# EAGLE board INTEVLogger2 (EAGLE 7.6.0)
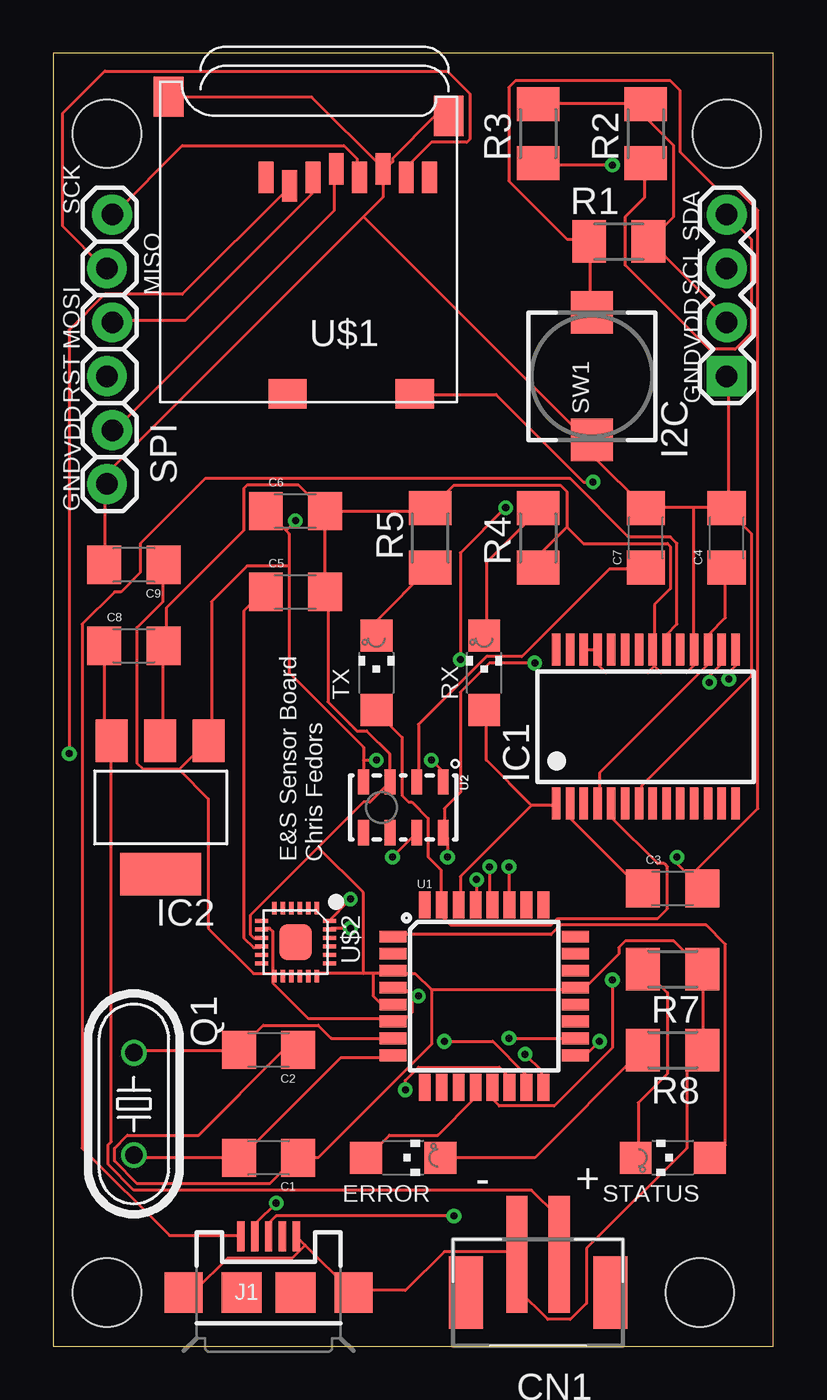
[diagram p0: board, top side]
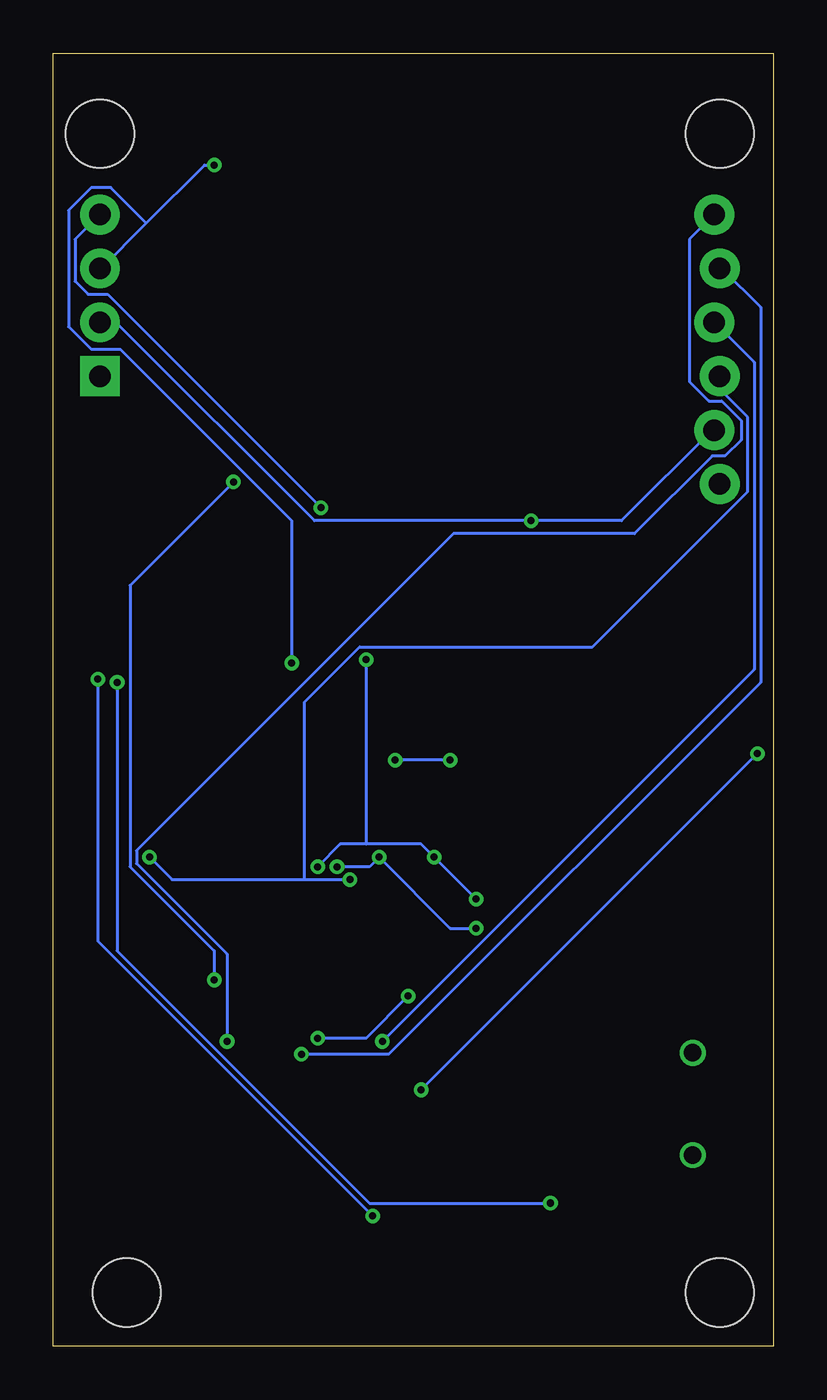
[diagram p1: board, bottom side, seen from below]

Size 33.96 x 60.95 mm. Coordinates in mm from the lower left corner, seen from the top.
Outline: 0,0 33.96,0 33.96,60.95 0,60.95 0,0
Copper layers (1*16): Top 0.0356mm / dielectric 1.5011mm / Bottom 0.0356mm
Design rules "LaenPCBOrder": minimum track width 6mil, minimum drill 13mil, track to track 6mil, track to pad 6mil, pad to pad 6mil, via to via 6mil, smd to smd 6mil, copper to edge 15mil, drill to drill 6mil, minimum pad ring 7mil, minimum via ring 7mil, stop-mask expansion 3mil, vias tented up to drill 0mil, thermal gap 10mil
Holes 3.2 mm at 31.75,57.15 2.54,57.15 2.54,2.54 30.48,2.54

## Footprints (pad centres in the part's own frame; a part is rotated, then mirrored left to right if it is on the bottom)
1206 = smd 1.6 x 1.8: 1 -1.4,0; 2 1.4,0
JST-PH-2-SMT = smd 1 x 5.5: 1 -1,-1.8; 2 1,-1.8 | smd 1.6 x 3.4: NC1 -3.4,0; NC2 3.4,0
1X04 = drill 1.016 pad 1.88 square: 1 0,0 | drill 1.016 pad 1.88: 2 2.54,0; 3 5.08,0; 4 7.62,0
SSOP28 = smd 0.4 x 1.5: 1 -4.225,-3.625; 2 -3.575,-3.625; 3 -2.925,-3.625; 4 -2.275,-3.625; 5 -1.625,-3.625; 6 -0.975,-3.625; 7 -0.325,-3.625; 8 0.325,-3.625; 9 0.975,-3.625; 10 1.625,-3.625; 11 2.275,-3.625; 12 2.925,-3.625; 13 3.575,-3.625; 14 4.225,-3.625; 15 4.225,3.625; 16 3.575,3.625; 17 2.925,3.625; 18 2.275,3.625; 19 1.625,3.625; 20 0.975,3.625; 21 0.325,3.625; 22 -0.325,3.625; 23 -0.975,3.625; 24 -1.625,3.625; 25 -2.275,3.625; 26 -2.925,3.625; 27 -3.575,3.625; 28 -4.225,3.625
SOT223 = smd 1.499 x 2.007: 1 -2.261,-3.15; 2 0.025,-3.15; 3 2.311,-3.15 | smd 3.81 x 2.007: 4 0,3.15
USB-MICROB = smd 0.35 x 1.4: D+ 0,2.65; D- -0.65,2.65; GND 1.3,2.65; ID 0.65,2.65; VBUS -1.3,2.65 | smd 1.8 x 1.9: MT1 -4,0; MT2 4,0 | smd 1.9 x 1.9: P$1 -1.27,0; P$2 1.27,0
CHIPLED_1206 = smd 1.5 x 1.5: A 0,-1.75; C 0,1.75
HC49/S = drill 0.813: 1 -2.413,0; 2 2.413,0
M1206 = smd 1.6 x 2: 1 -1.4,0; 2 1.4,0
1X06_LOCK = drill 1.016 pad 1.88: 1 0,0; 2 2.54,-0.254; 3 5.08,0; 4 7.62,-0.254; 5 10.16,0; 6 12.7,-0.254
PUSHBUTTON_SMD_SJ = smd 2 x 2: P$1 3,0; P$2 -3,0
TQFP32-08 = smd 1.27 x 0.559: 1 -4.293,2.8; 2 -4.293,2; 3 -4.293,1.2; 4 -4.293,0.4; 5 -4.293,-0.4; 6 -4.293,-1.2; 7 -4.293,-2; 8 -4.293,-2.8; 17 4.293,-2.8; 18 4.293,-2; 19 4.293,-1.2; 20 4.293,-0.4; 21 4.293,0.4; 22 4.293,1.2; 23 4.293,2; 24 4.293,2.8 | smd 0.559 x 1.27: 9 -2.8,-4.293; 10 -2,-4.293; 11 -1.2,-4.293; 12 -0.4,-4.293; 13 0.4,-4.293; 14 1.2,-4.293; 15 2,-4.293; 16 2.8,-4.293; 25 2.8,4.293; 26 2,4.293; 27 1.2,4.293; 28 0.4,4.293; 29 -0.4,4.293; 30 -1.2,4.293; 31 -2,4.293; 32 -2.8,4.293
LGA8 = smd 1.2 x 0.5: 1 -1.2,1.875; 2 -1.2,0.625; 3 -1.2,-0.625; 4 -1.2,-1.875; 5 1.2,-1.875; 6 1.2,-0.625; 7 1.2,0.625; 8 1.2,1.875
MICROSD = smd 0.7 x 1.5: 1 9,-10.64; 2 7.9,-10.24; 3 6.8,-10.64; 4 5.7,-11.04; 5 4.6,-10.64; 6 3.5,-11.04; 7 2.4,-10.64; 8 1.3,-10.64 | smd 1.8 x 1.4: CD1 2,-0.44; CD2 8,-0.44 | smd 1.4 x 1.9: MT1 0.4,-13.54; MT2 13.6,-14.44
LEAD-QFN24 = smd 0.6 x 0.2: 1 -1.6,1; 2 -1.6,0.6; 3 -1.6,0.2; 4 -1.6,-0.2; 5 -1.6,-0.6; 6 -1.6,-1; 13 1.6,-1; 14 1.6,-0.6; 15 1.6,-0.2; 16 1.6,0.2; 17 1.6,0.6; 18 1.6,1 | smd 0.2 x 0.6: 7 -1,-1.6; 8 -0.6,-1.6; 9 -0.2,-1.6; 10 0.2,-1.6; 11 0.6,-1.6; 12 1,-1.6; 19 1,1.6; 20 0.6,1.6; 21 0.2,1.6; 22 -0.2,1.6; 23 -0.6,1.6; 24 -1,1.6 | smd 1.7 x 1.54: 25 0,0

## Placement (x,y rotation side)
C1  22 pF  [1206]  10.16,8.89 180 top
C2  22 pF  [1206]  10.16,13.97 180 top
C3  0.1 uF  [1206]  29.21,21.59 0 top
C4  0.1 uF  [1206]  31.75,38.1 90 top
C5  0.1 uF  [1206]  11.43,35.56 0 top
C6  0.1 uF  [1206]  11.43,39.37 0 top
C7  0.1 uF  [1206]  27.94,38.1 90 top
C8  0.1 uF  [1206]  3.81,33.02 0 top
C9  10 uF  [1206]  3.81,36.83 180 top
CN1  [JST-PH-2-SMT]  22.86,2.54 180 top
I2C  [1X04]  31.75,45.72 90 top
IC1  FT232RL  [SSOP28]  27.94,29.21 0 top
IC2  REG1118  [SOT223]  5.08,25.4 180 top
J1  USB-MICROB  [USB-MICROB]  10.16,2.54 0 top
LED1  YELLOW  [CHIPLED_1206]  20.32,31.75 0 top
LED2  YELLOW  [CHIPLED_1206]  15.24,31.75 0 top
LED4  GREEN  [CHIPLED_1206]  29.21,8.89 90 top
LED5  RED  [CHIPLED_1206]  16.51,8.89 270 top
Q1  8 MHz  [HC49/S]  3.81,11.43 270 top
R1  10k  [M1206]  26.67,52.07 180 top
R2  10k  [M1206]  27.94,57.15 90 top
R3  10k  [M1206]  22.86,57.15 90 top
R4  100  [M1206]  22.86,38.1 90 top
R5  100  [M1206]  17.78,38.1 270 top
R7  100  [M1206]  29.21,17.78 180 top
R8  100  [M1206]  29.21,13.97 180 top
SPI  [1X06_LOCK]  2.54,40.64 90 top
SW1  [PUSHBUTTON_SMD_SJ]  25.4,45.72 90 top
U1  ATMEGA328P_TQFP  [TQFP32-08]  20.32,16.51 0 top
U2  MPL3115A2LGA8  [LGA8]  16.51,25.4 270 top
U$1  MICROSD  [MICROSD]  19.05,44.45 180 top
U$2  MPU-9250  [LEAD-QFN24]  11.43,19.05 270 top

## Library data of the parts
C1-C9 = SparkFun-Capacitors
CN1 LED1 LED2 LED4 LED5 R1-R5 R7 R8 SW1 U$1 = adafruit
I2C = SparkFun-Connectors; PROD_ID: CONN-09696
IC1 = ftdichip; MPN: FT232RL; OC_FARNELL: 1146032; OC_NEWARK: 91K9918
IC2 = burr-brown; MPN: REG1118-2.85/2K5G4; OC_FARNELL: unknown; OC_NEWARK: 14M2185
J1 = SparkFun-Connectors; PROD_ID: CONN-09505
Q1 = adafruit; OC_FARNELL: 1667008; OC_NEWARK: unknown
SPI = SparkFun-Connectors
U1 = SparkFun-DigitalIC; PROD_ID: IC-09069
U2 = SparkFun-Sensors; PROD_ID: IC-10869
U$2 = invensense

## Nets
CD: U1.13 U$1.CD1
CS: U1.14 U$1.2
DM: IC1.16 J1.D-
DP: IC1.15 J1.D+
DTR: C3.1 IC1.2
GND: C1.1 C2.1 C4.2 C5.2 C6.2 C7.2 C8.2 C9.2 CN1.2 I2C.1 IC1.7 IC1.18 IC1.21 IC1.25 IC1.26 IC2.2 J1.GND J1.MT1 J1.MT2 R4.1 R5.1 R7.1 R8.1 SPI.1 SW1.P$2 U1.3 U1.5 U1.21 U2.3 U$1.6 U$1.MT1 U$1.MT2 U$2.9 U$2.18
MISO: SPI.5 U1.16 U$1.7
MOSI: SPI.4 U1.15 U$1.3
N$1: C1.2 Q1.2 U1.8
N$2: C2.2 Q1.1 U1.7
N$3: C5.1 U$2.10
N$4: LED4.A U1.1
N$5: C8.1 CN1.1 IC2.3
N$6: C4.1 IC1.4 IC1.17
N$7: U1.23
N$8: C7.1 U2.2
N$9: U1.24
N$10: LED4.C R7.2
N$12: LED1.C R4.2
N$13: LED2.C R5.2
N$15: LED5.C R8.2
RESET: C3.2 R1.2 SPI.3 SW1.P$1 U1.29
RLED: LED5.A U1.12
RX: IC1.1 LED1.A U1.30
SCK: SPI.6 U1.17 U$1.5
SCL: I2C.3 R3.1 U1.28 U2.8 U$2.23
SDA: I2C.4 R2.1 U1.27 U2.7 U$2.24
TX: IC1.5 LED2.A U1.31
USBVDD: IC1.20 J1.VBUS
VDD: C6.1 C9.1 I2C.2 IC2.1 R1.1 R2.2 R3.2 SPI.2 U1.4 U1.6 U1.18 U2.1 U2.4 U$1.4 U$2.8 U$2.13

## Tracks (layer width: path | path; a pad name or v marks a point on that pad's centre or on a via)
CD  (via drill 0.33)
  Top 0.152: v26.36,17.27 26.36,14.07 23.62,11.33 21.03,11.33 20.73,11.63 20.73,12.09 U1.13 | v25.45,40.74 24.99,40.74 20.88,44.86 17.07,44.86 U$1.CD1
  Bottom 0.152: v26.36,17.27 26.36,18.64 30.33,22.61 30.33,35.87 v25.45,40.74
CS  (via drill 0.33)
  Top 0.152: v16.61,12.09 16.61,12.55 17.22,13.16 21.03,13.16 21.49,12.7 21.49,12.24 U1.14 | v0.76,27.94 0.76,47.9 2.44,49.58 6.1,49.58 11.12,54.61 U$1.2
  Bottom 0.152: v0.76,27.94 v16.61,12.09
DM  (via drill 0.33)
  Top 0.152: v10.52,6.76 9.6,5.84 9.6,5.23 J1.D- | v30.94,31.29 30.94,31.6 31.39,32.05 31.39,32.82 IC1.16
  Bottom 0.152: v10.52,6.76 19.05,6.76 30.94,18.64 v30.94,31.29
DP  (via drill 0.33)
  Top 0.152: v18.9,6.15 10.52,6.15 10.21,5.84 10.21,5.23 J1.D+ | v31.85,31.45 31.85,31.75 32.16,32.05 32.16,32.82 IC1.15
  Bottom 0.152: v18.9,6.15 31.85,19.1 v31.85,31.45
DTR
  Top 0.152: IC1.2 24.38,25.5 24.38,24.89 27.74,21.54 C3.1
GND
  Top 0.152: 11.89,4.77 14.02,2.64 J1.MT2 14.17,2.64 16.61,2.64 18.44,4.47 21.79,4.47 CN1.2 21.95,4.32 21.95,2.64 23.32,1.27 24.38,1.27 25.15,2.03 25.15,4.62 29.87,9.35 29.87,13.31 30.48,13.92 R8.1 30.63,14.07 30.63,17.73 R7.1 30.48,17.88 29.26,19.1 26.98,19.1 26.67,18.8 26.67,18.49 25.15,16.97 24.69,16.97 U1.21 24.54,16.81 17.83,16.81 | 11.89,4.77 11.58,5.08 J1.GND | 11.89,4.77 11.28,4.17 8.23,4.17 6.71,2.64 6.25,2.64 J1.MT1 | 12.5,23.52 14.63,25.65 14.94,25.65 15.85,26.57 U2.3 15.85,26.72 15.85,27.94 14.78,29.01 14.33,29.01 12.95,30.38 12.95,35.56 C5.2 12.8,35.56 12.8,39.37 | 12.5,23.52 9.3,20.32 9.3,19.41 9.45,19.25 9.75,19.25 U$2.9 | 15.09,17.58 16,17.58 U1.3 16.15,17.58 17.07,17.58 17.83,16.81 | 15.09,17.58 14.63,17.58 | 14.63,17.58 12.5,17.58 U$2.18 | 15.09,17.58 15.09,16.51 15.39,16.2 16,16.2 U1.5 | 17.83,16.81 17.83,14.22 12.5,8.89 C1.1 11.43,8.89 10.21,7.67 3.96,7.67 2.9,8.74 2.9,9.35 3.5,9.96 6.86,9.96 10.82,13.92 11.43,13.92 C2.1 | 12.5,23.52 14.63,21.39 14.63,17.58 | C9.2 2.44,36.93 2.44,40.59 SPI.1 2.59,40.74 2.59,41.2 14.63,53.24 | U$1.6 15.7,55.52 16,55.83 16,55.98 17.98,57.96 18.59,57.96 U$1.MT1 | U$1.MT2 5.49,58.88 12.19,58.88 15.54,55.52 U$1.6 | 14.63,53.24 15.54,54.15 15.54,55.37 U$1.6 | IC1.26 25.15,32.82 25.6,32.82 IC1.25 25.76,32.82 25.76,32.05 26.06,31.75 28.04,31.75 28.35,32.05 | 28.35,32.05 28.35,32.82 IC1.21 28.35,32.97 28.35,34.95 29.11,35.71 29.11,37.69 28.96,37.85 24.99,37.85 24.23,38.61 | 28.35,32.05 28.65,31.75 29.87,31.75 30.18,32.05 30.18,32.82 IC1.18 30.18,32.97 30.18,39.52 | IC1.7 27.74,25.65 27.74,26.42 32.92,31.6 32.92,38.3 31.85,39.37 C4.2
  Top 0.152: 30.18,39.52 31.7,39.52 C4.2 | 30.18,39.52 28.04,39.52 C7.2 27.89,39.52 25.45,41.96 25.45,42.57 SW1.P$2 25.3,42.57 14.63,53.24 | I2C.1 31.85,45.62 31.85,39.52 C4.2 | IC2.2 5.18,28.55 5.18,32.97 C8.2 5.33,33.12 5.33,34.8 8.99,38.46 8.99,40.44 9.14,40.59 11.58,40.59 12.8,39.37 | R4.1 22.86,37.24 24.23,38.61 | 24.23,38.61 24.23,40.28 23.93,40.59 18.9,40.59 17.83,39.52 R5.1 17.68,39.37 C6.2 12.8,39.37
MISO  (via drill 0.33)
  Top 0.152: v22.25,13.77 23.01,13 23.01,12.24 U1.16 | U$1.7 16.76,55.22 16.76,55.68 17.83,56.74 19.51,56.74 19.66,56.9 19.66,59.03 18.59,60.1 2.44,60.1 0.46,58.11 0.46,52.78 2.44,50.8 SPI.5
  Bottom 0.152: v22.25,13.77 18.14,13.77 0.61,31.29 0.61,48.97 2.44,50.8 SPI.5
MOSI  (via drill 0.33)
  Top 0.152: v18.44,14.38 20.73,14.38 22.25,12.85 22.25,12.24 U1.15 | U$1.3 12.19,55.07 12.19,54.3 6.25,48.36 2.9,48.36 SPI.4
  Bottom 0.152: v18.44,14.38 0.91,31.9 0.91,46.38 SPI.4
N$1
  Top 0.152: U1.8 16,13.61 13.56,13.61 8.84,8.89 C1.2 3.81,8.89 Q1.2
N$2
  Top 0.152: U1.7 16,14.53 13.11,14.53 12.5,15.14 9.91,15.14 8.84,14.07 C2.2 8.69,13.92 3.81,13.92 Q1.1
N$3
  Top 0.152: U$2.10 9.75,18.8 9.45,18.8 8.99,19.25 8.99,34.65 9.91,35.56 C5.1
N$4
  Top 0.152: U1.1 16.15,19.41 23.47,19.41 23.93,19.86 30.79,19.86 31.7,18.95 31.7,9.5 31.09,8.89 LED4.A
N$5
  Top 0.152: 2.74,28.55 2.44,28.85 2.44,32.97 C8.1 | 2.74,28.55 2.74,9.65 2.59,9.5 2.59,8.58 3.81,7.37 22.55,7.37 23.77,6.15 23.77,4.47 CN1.1 | 2.74,28.55 IC2.3
N$6
  Top 0.152: IC1.4 25.76,25.65 25.76,27.03 30.79,32.05 30.79,32.82 IC1.17 30.94,32.97 30.94,33.58 31.7,34.34 31.7,36.63 C4.1
N$8
  Top 0.152: U2.2 17.22,26.72 17.22,29.31 20.42,32.51 22.1,32.51 26.21,36.63 27.89,36.63 C7.1
N$10
  Top 0.152: LED4.C 27.58,8.89 27.58,11.48 28.96,12.85 28.96,16.66 27.89,17.73 R7.2
N$12
  Top 0.152: LED1.C 20.42,33.58 20.42,36.93 22.86,39.37 R4.2
N$13
  Top 0.152: LED2.C 15.24,34.19 17.68,36.63 R5.2
N$15
  Top 0.152: LED5.C 22.71,8.89 27.74,13.92 R8.2
RESET  (via drill 0.33)
  Top 0.152: SW1.P$1 25.3,48.82 25.3,52.02 R1.2 25.15,52.17 24.23,52.17 21.49,54.91 21.49,59.33 21.79,59.64 29.11,59.64 29.57,59.18 29.57,56.29 31.24,54.61 32.16,54.61 33.22,53.54 33.22,25.35 30.02,22.15 | v19.96,22 19.96,20.93 U1.29 | v29.41,23.06 29.41,22.76 30.02,22.15 | 30.02,22.15 30.48,21.69 C3.2 30.02,22.15
  Bottom 0.152: 22.1,22 28.35,22 v29.41,23.06 | 22.1,22 v19.96,22 | 22.1,22 22.1,30.38 19.51,32.97 8.53,32.97 1.22,40.28 1.22,43.79 2.44,45.01 2.44,45.62 SPI.3
RLED
  Top 0.152: U1.12 19.81,12.09 19.81,11.63 18.14,9.96 15.85,9.96 14.78,8.89 LED5.A
RX
  Top 0.152: 22.55,25.5 19.2,22.15 19.2,20.93 U1.30 | 22.55,25.5 23.62,25.5 IC1.1 | 22.55,25.5 20.42,27.63 20.42,29.92 LED1.A
SCK  (via drill 0.33)
  Top 0.152: v25.76,14.38 25.15,13.77 24.69,13.77 U1.17 | U$1.5 14.33,55.22 14.33,55.98 13.72,56.59 6.1,56.59 2.9,53.39 SPI.6
  Bottom 0.152: v25.76,14.38 25.76,18.49 30.02,22.76 30.02,23.37 15.09,38.3 6.55,38.3 2.9,41.96 2.29,41.96 1.52,42.72 1.52,43.64 2.44,44.55 3.05,44.55 3.96,45.47 3.96,52.17 SPI.6
SCL  (via drill 0.33)
  Top 0.152: v14.02,19.71 13.11,19.71 U$2.23 | v18.59,23.06 18.59,23.98 18.44,24.13 U2.8 18.44,24.28 18.44,25.35 19.2,26.11 19.2,30.84 20.57,32.21 v22.71,32.21 | v20.57,22.61 20.57,20.93 U1.28 | v26.36,55.68 22.86,55.68 R3.1
  Bottom 0.152: v14.02,19.71 15.24,19.71 v18.59,23.06 19.05,22.61 v20.57,22.61 | v26.36,55.68 26.82,55.68 29.57,52.93 | 29.57,52.93 31.7,50.8 I2C.3 | v22.71,32.21 22.71,38.91 30.79,46.99 32.16,46.99 33.22,48.06 33.22,53.54 32.16,54.61 31.24,54.61 29.57,52.93
SDA  (via drill 0.33)
  Top 0.152: v14.02,21.08 12.95,20.02 U$2.24 | v16,23.06 17.07,24.13 U2.7 | v21.49,22.61 21.49,20.93 U1.27 | I2C.4 32.92,52.17 32.92,47.75 32.16,46.99 30.94,46.99 26.98,50.95 26.98,53.24 27.89,54.15 27.89,55.68 R2.1 | v19.2,32.36 19.2,37.39 v21.34,39.52
  Bottom 0.152: v14.02,21.08 v16,23.06 16.61,23.67 19.2,23.67 | v21.49,22.61 20.42,23.67 19.2,23.67 | v19.2,32.36 19.2,23.67 | v21.34,39.52 31.39,49.58 32.31,49.58 32.92,50.19 32.92,52.17 I2C.4
TX
  Top 0.152: LED2.A 15.24,29.92 16.46,28.7 16.46,25.96 16.76,25.65 16.92,25.65 17.68,24.89 17.68,23.06 18.29,22.45 18.29,20.93 U1.31 18.44,20.78 18.44,20.17 18.75,19.86 23.47,19.86 23.77,20.17 28.5,20.17 28.96,20.62 28.96,22.61 28.8,22.76 28.5,22.76 26.36,24.89 26.36,25.5 IC1.5
USBVDD
  Top 0.152: J1.VBUS 8.84,5.23 5.49,5.23 1.37,9.35 1.37,34.04 2.9,35.56 3.2,35.56 4.12,36.47 4.12,37.85 7.16,40.89 24.38,40.89 27.13,38.15 29.11,38.15 29.41,37.85 29.41,34.04 28.96,33.58 28.96,32.97 IC1.20
VDD  (via drill 0.33)
  Top 0.152: 10.36,17.58 10.36,19.56 10.21,19.71 9.91,19.71 U$2.8 | 16.92,16.51 16.92,15.75 16.61,15.44 16.15,15.44 U1.6 16,15.44 12.04,15.44 10.36,17.12 10.36,17.42 U$2.13 10.36,17.58 | 16.92,16.51 16.61,16.81 16.15,16.81 U1.4 | v21.49,14.53 24.54,14.53 U1.18 | 16.92,16.51 v17.22,16.51 | 5.94,27.18 4.27,27.18 3.96,27.48 3.96,33.88 5.18,35.1 5.18,36.78 C9.1 | 5.94,27.18 7.32,28.55 IC2.1 7.47,28.55 7.47,35.1 9.14,36.78 11.12,36.78 | 14.63,27.63 14.63,28.24 11.12,31.75 11.12,36.78 | 14.63,27.63 14.63,26.72 U2.4 | 11.12,36.78 11.12,38.3 10.97,38.46 | 10.97,38.46 10.06,39.37 C6.1 | v17.83,27.63 18.29,27.18 18.29,26.72 U2.1 | 14.63,27.63 v15.24,27.63 | 10.36,17.58 9.45,17.58 7.32,19.71 7.32,25.81 5.94,27.18 | R3.2 22.86,58.57 27.89,58.57 R2.2 28.04,58.42 28.04,57.81 29.26,56.59 29.26,53.24 28.19,52.17 R1.1 28.19,52.02 31.85,48.36 I2C.2 | U$1.4 13.26,55.37 13.26,53.54 2.9,43.18 SPI.2 | v11.43,38.91 10.97,38.46
  Bottom 0.152: v21.49,14.53 19.2,14.53 v17.22,16.51 | v15.24,27.63 v17.83,27.63 | I2C.2 31.7,48.21 30.94,48.21 21.64,38.91 v11.43,38.91 7.16,38.91 2.9,43.18 SPI.2

## Text on the board
tNames: SCK | SDA | MISO | SCL | MOSI | VDD | RST | GND | VDD | GND | TX | RX | E&S Sensor Board / Chris Fedors | ERROR | STATUS